# Altium PCB COMMS_ECU_revA.PcbDoc (part 3 of 6)
Units mm, origin at the board's own origin, x right, y up, seen from the top; angles counter-clockwise.
Board outline 370 x 261 mm, 6 copper layers (Top Layer, Mid Layer 1, Mid Layer 2, Mid Layer 3, Mid Layer 4, Bottom Layer), stack 1.538 mm thick; 739 components, 500 nets, 2454 pads, 325 vias.
Unrouted connection lines stored in the file: 1573.
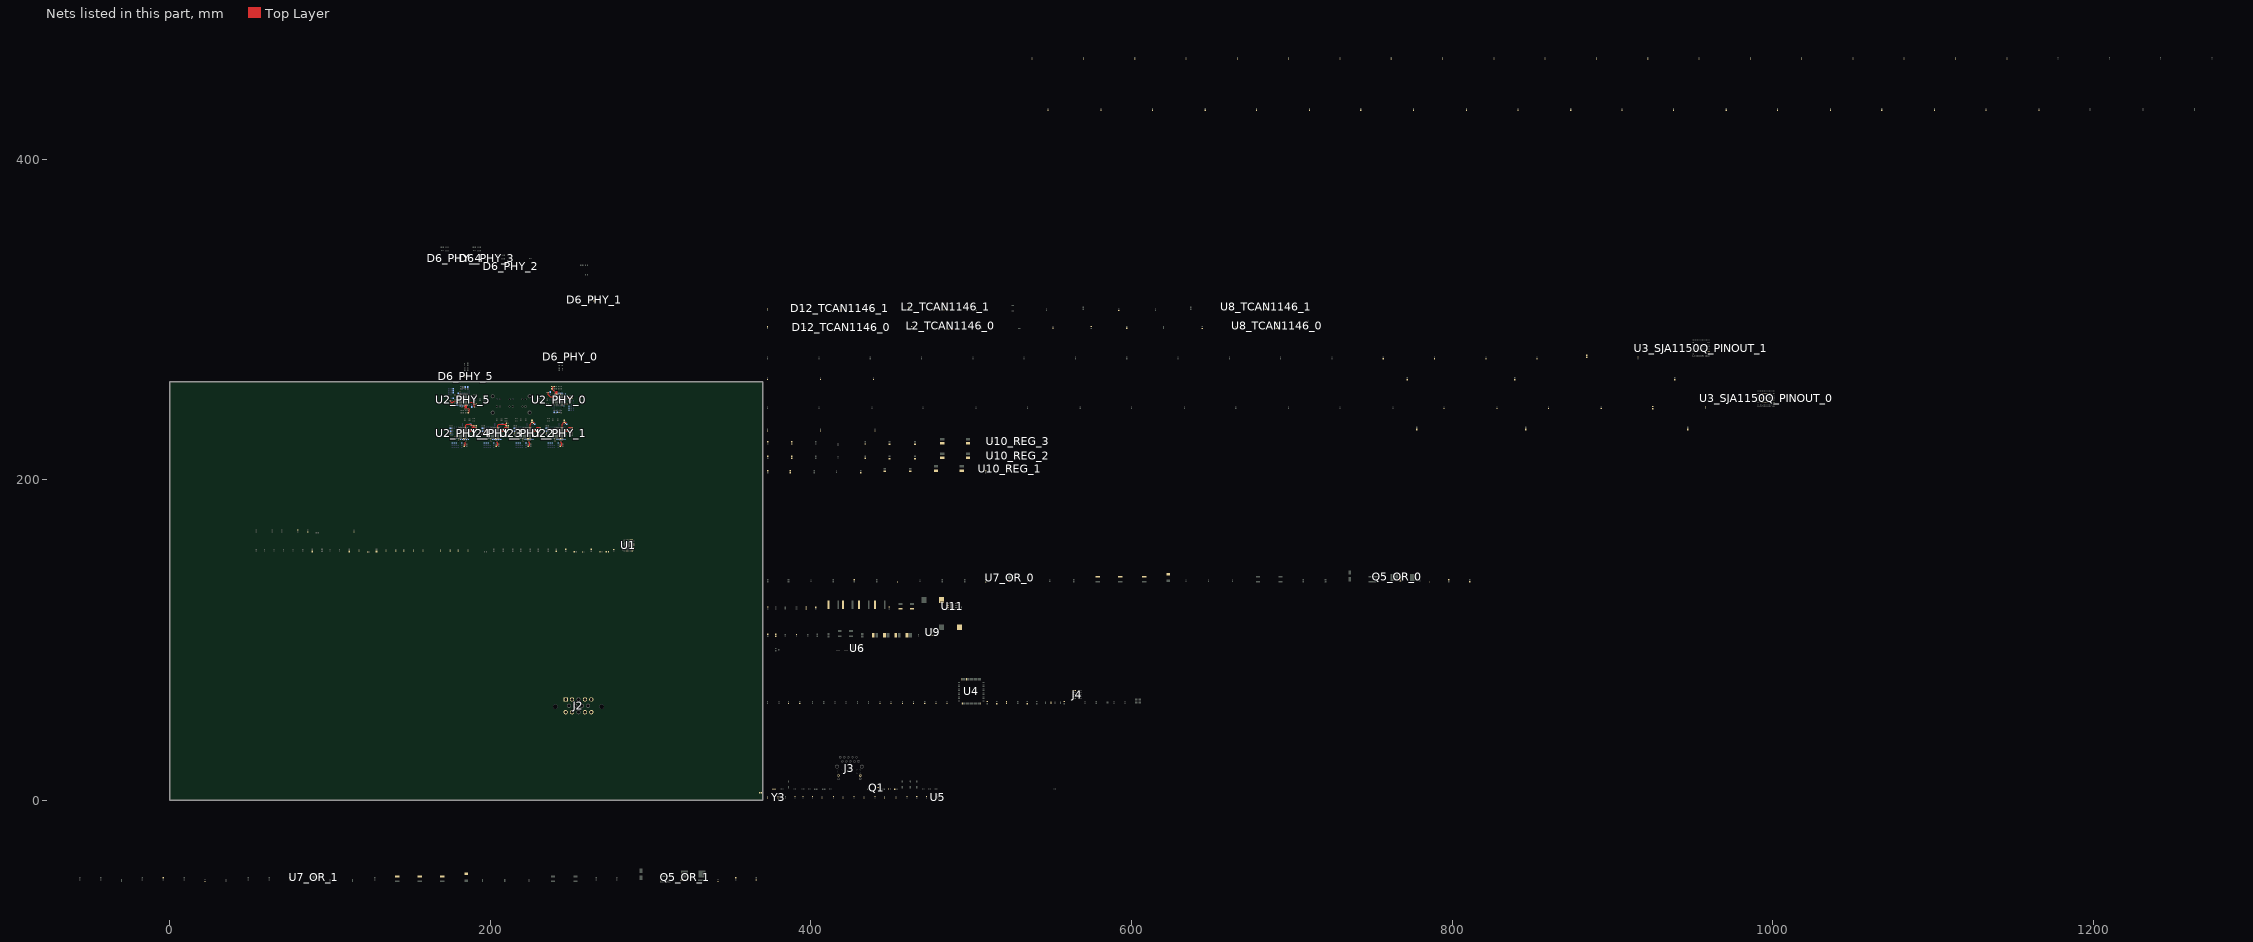
[diagram p3: the nets of this part, all layers, seen from the top]

## Footprints (in the part's own frame and the unit in brackets; to place one, negate y for a bottom-side part, rotate by r counter-clockwise, add the part's x,y. Pads: shape width x height; smd on the part's side, far side on the other; paste and mask are expansions set on the pad) (continued)
FP-RPH0016A-MFG [mm]
  round 0.743 smd paste-1000 mask+0: 1(-1.262,1.763)
  rrect25% 1.075x0.4 smd paste+0 mask+0: 2(-1.413,0.55) 14(1.413,0.55)
  rrect40% 0.825x0.25 smd paste+0 mask+0: 3(-1.538,-0.525) 4(-1.538,-1.025) 5(-1.538,-1.525) 11(1.538,-1.525) 12(1.538,-1.025) 13(1.538,-0.525)
  round 0.495 smd paste-1000 mask+0: 6(-1.125,-2.175) 10(1.125,-2.175)
  rrect40% 0.25x0.675 smd paste+0 mask+0: 7(-0.5,-2.113) 9(0.5,-2.113)
  rrect40% 0.25x0.825 smd paste+0 mask+0: 8(0,-2.038)
  round 0.787 smd paste-1000 mask+0: 15(1.281,1.831)
  rrect29% 0.35x2.975 smd paste+0 mask+0: 16(0,0.963)
  Top Layer region: 1.9,1.35 1.925,1.357 1.943,1.375 1.95,1.4 1.95,1.4 1.95,2.05 1.943,2.075 1.925,2.093 1.9,2.1 1.9,2.1 1.65,2.1 1.631,2.104 1.615,2.115 1.604,2.131 1.6,2.15 1.6,2.15 1.6,2.4 1.593,2.425 1.575,2.443 1.55,2.45 1.55,2.45 0.85,2.45 0.825,2.443 0.807,2.425 0.8,2.4 0.8,2.4 0.8,1.4 0.807,1.375 0.825,1.357 0.85,1.35 0.85,1.35 0.85,1.35
  Top Layer region: -1.9,1.35 -1.925,1.357 -1.943,1.375 -1.95,1.4 -1.95,1.4 -1.95,2.05 -1.943,2.075 -1.925,2.093 -1.9,2.1 -1.9,2.1 -1.65,2.1 -1.631,2.104 -1.615,2.115 -1.604,2.131 -1.6,2.15 -1.6,2.15 -1.6,2.4 -1.593,2.425 -1.575,2.443 -1.55,2.45 -1.55,2.45 -0.85,2.45 -0.825,2.443 -0.807,2.425 -0.8,2.4 -0.8,2.4 -0.8,1.4 -0.807,1.375 -0.825,1.357 -0.85,1.35 -0.85,1.35 -0.85,1.35
  Top Layer region: 1.55,-2.45 1.575,-2.443 1.593,-2.425 1.6,-2.4 1.6,-2.4 1.6,-2.15 1.604,-2.131 1.615,-2.115 1.631,-2.104 1.65,-2.1 1.65,-2.1 1.9,-2.1 1.925,-2.093 1.943,-2.075 1.95,-2.05 1.95,-2.05 1.95,-1.95 1.943,-1.925 1.925,-1.907 1.9,-1.9 1.9,-1.9 0.9,-1.9 0.875,-1.907 0.857,-1.925 0.85,-1.95 0.85,-1.95 0.85,-2.4 0.857,-2.425 0.875,-2.443 0.9,-2.45 0.9,-2.45 0.9,-2.45
  Top Layer region: -1.55,-2.45 -1.575,-2.443 -1.593,-2.425 -1.6,-2.4 -1.6,-2.4 -1.6,-2.15 -1.604,-2.131 -1.615,-2.115 -1.631,-2.104 -1.65,-2.1 -1.65,-2.1 -1.9,-2.1 -1.925,-2.093 -1.943,-2.075 -1.95,-2.05 -1.95,-2.05 -1.95,-1.95 -1.943,-1.925 -1.925,-1.907 -1.9,-1.9 -1.9,-1.9 -0.9,-1.9 -0.875,-1.907 -0.857,-1.925 -0.85,-1.95 -0.85,-1.95 -0.85,-2.4 -0.857,-2.425 -0.875,-2.443 -0.9,-2.45 -0.9,-2.45 -0.9,-2.45
  silkscreen extent -2.67,-2.88 1.8,2.88, body extent -2.05,-2.55 2.05,2.55, height 0.25
FP-SMB-CA-MFG [mm]
  rect 1.62x2.18 smd paste+0 mask+0: 1(-2.11,0) 2(2.11,0)
  silkscreen extent -2.3,-1.97 2.3,1.97, body extent -3.02,-2.07 3.02,2.07, height 0.25
FP-SOD-123-IPC_A [mm]
  rect 1.308x0.762 smd paste+0 mask+0: 1(-1.825,0)
  rrect100% 1.308x0.762 smd paste+0 mask+0: 2(1.825,0)
  silkscreen extent -2.39,-0.8 1.35,1.01, body extent -2.98,-1.3 2.98,1.3, height 0.25
FP-SOT323-3L-MFG [mm]
  rect 0.7x0.42 smd paste+0 mask+0: 1(-1,0.65) 2(-1,-0.65) 3(1,0)
  silkscreen extent -0.67,-1.1 0.67,1.1, body extent -1.45,-1.2 1.45,1.2, height 0.25
FP-SRF4532-MFG [mm]
  round 0.99 smd paste+0 mask+0: 1(-2.05,-1.25) 2(2.05,-1.25)
  round 0.97 smd paste+0 mask+0: 3(2.05,1.125) 4(-2.05,1.125)
  Top Layer region: -2.6,0.45 -2.6,1.8 -1.5,1.8 -1.5,0.95 -1.9,0.45
  Top Layer region: 1.5,1.8 2.6,1.8 2.6,0.45 1.9,0.45 1.5,0.95
  Top Layer region: 1.5,-1.8 1.5,-0.95 1.9,-0.45 2.6,-0.45 2.6,-1.8
  Top Layer region: -2.6,-1.8 -2.6,-0.45 -1.9,-0.45 -1.5,-0.95 -1.5,-1.8
  silkscreen extent -2.17,-2.47 1.12,1.7, body extent -2.7,-1.9 2.7,1.9, height 0.25
NDG20S2_MFG [mm] "Recommended Land Pattern"
  round 0.18 smd paste+0 mask+0: 1(-1.385,0.8) 2(-1.385,0.4) 3(-1.385,0) 4(-1.375,-0.4) 5(-1.375,-0.8) 6(-0.8,-1.385) 7(-0.4,-1.385) 8(0,-1.385) 9(0.4,-1.375) 10(0.8,-1.375) 11(1.385,-0.8) 12(1.385,-0.4) 13(1.385,0) 14(1.375,0.4) 15(1.375,0.8) 16(0.8,1.385) 17(0.4,1.385) 18(0,1.385) 19(-0.4,1.375) 20(-0.8,1.375)
  round 1.485 smd paste+0 mask+0: 21(0,0)
  Top Layer region: 1.65,0.7 1.2,0.7 1.162,0.708 1.129,0.729 1.108,0.762 1.1,0.8 1.1,0.8 1.108,0.838 1.129,0.871 1.162,0.892 1.2,0.9 1.2,0.9 1.65,0.9
  Top Layer region: -0.7,1.65 -0.7,1.2 -0.713,1.15 -0.75,1.113 -0.8,1.1 -0.8,1.1 -0.838,1.108 -0.871,1.129 -0.892,1.162 -0.9,1.2 -0.9,1.2 -0.9,1.65
  Top Layer region: -0.1,-1.65 -0.1,-1.2 -0.092,-1.162 -0.071,-1.129 -0.038,-1.108 0,-1.1 0,-1.1 0.038,-1.108 0.071,-1.129 0.092,-1.162 0.1,-1.2 0.1,-1.2 0.1,-1.65
  Top Layer region: -1.65,-0.3 -1.2,-0.3 -1.162,-0.308 -1.129,-0.329 -1.108,-0.362 -1.1,-0.4 -1.1,-0.4 -1.113,-0.45 -1.15,-0.487 -1.2,-0.5 -1.2,-0.5 -1.65,-0.5
  Top Layer region: 0.5,1.65 0.5,1.2 0.487,1.15 0.45,1.113 0.4,1.1 0.4,1.1 0.362,1.108 0.329,1.129 0.308,1.162 0.3,1.2 0.3,1.2 0.3,1.65
  Top Layer region: 1.65,-0.1 1.2,-0.1 1.162,-0.092 1.129,-0.071 1.108,-0.038 1.1,0 1.1,0 1.108,0.038 1.129,0.071 1.162,0.092 1.2,0.1 1.2,0.1 1.65,0.1
  Top Layer region: -0.825,-0.825 0.825,-0.825 0.825,0.825 -0.525,0.825 -0.825,0.525
  Top Layer region: 0.7,-1.65 0.7,-1.2 0.708,-1.162 0.729,-1.129 0.762,-1.108 0.8,-1.1 0.8,-1.1 0.838,-1.108 0.871,-1.129 0.892,-1.162 0.9,-1.2 0.9,-1.2 0.9,-1.65
  Top Layer region: -0.9,-1.65 -0.9,-1.2 -0.892,-1.162 -0.871,-1.129 -0.838,-1.108 -0.8,-1.1 -0.8,-1.1 -0.762,-1.108 -0.729,-1.129 -0.708,-1.162 -0.7,-1.2 -0.7,-1.2 -0.7,-1.65
  Top Layer region: -1.65,0.5 -1.2,0.5 -1.162,0.492 -1.129,0.471 -1.108,0.438 -1.1,0.4 -1.1,0.4 -1.113,0.35 -1.15,0.313 -1.2,0.3 -1.2,0.3 -1.65,0.3
  Top Layer region: -0.3,1.65 -0.3,1.2 -0.313,1.15 -0.35,1.113 -0.4,1.1 -0.4,1.1 -0.438,1.108 -0.471,1.129 -0.492,1.162 -0.5,1.2 -0.5,1.2 -0.5,1.65
  Top Layer region: 0.1,1.65 0.1,1.2 0.087,1.15 0.05,1.113 0,1.1 0,1.1 -0.038,1.108 -0.071,1.129 -0.092,1.162 -0.1,1.2 -0.1,1.2 -0.1,1.65
  Top Layer region: 0.9,1.65 0.9,1.2 0.887,1.15 0.85,1.113 0.8,1.1 0.8,1.1 0.762,1.108 0.729,1.129 0.708,1.162 0.7,1.2 0.7,1.2 0.7,1.65
  Top Layer region: 1.65,0.3 1.2,0.3 1.162,0.308 1.129,0.329 1.108,0.362 1.1,0.4 1.1,0.4 1.108,0.438 1.129,0.471 1.162,0.492 1.2,0.5 1.2,0.5 1.65,0.5
  Top Layer region: 1.65,-0.5 1.2,-0.5 1.162,-0.492 1.129,-0.471 1.108,-0.438 1.1,-0.4 1.1,-0.4 1.108,-0.362 1.129,-0.329 1.162,-0.308 1.2,-0.3 1.2,-0.3 1.65,-0.3
  Top Layer region: 1.65,-0.9 1.2,-0.9 1.162,-0.892 1.129,-0.871 1.108,-0.838 1.1,-0.8 1.1,-0.8 1.108,-0.762 1.129,-0.729 1.162,-0.708 1.2,-0.7 1.2,-0.7 1.65,-0.7
  Top Layer region: 0.3,-1.65 0.3,-1.2 0.308,-1.162 0.329,-1.129 0.362,-1.108 0.4,-1.1 0.4,-1.1 0.438,-1.108 0.471,-1.129 0.492,-1.162 0.5,-1.2 0.5,-1.2 0.5,-1.65
  Top Layer region: -0.5,-1.65 -0.5,-1.2 -0.492,-1.162 -0.471,-1.129 -0.438,-1.108 -0.4,-1.1 -0.4,-1.1 -0.362,-1.108 -0.329,-1.129 -0.308,-1.162 -0.3,-1.2 -0.3,-1.2 -0.3,-1.65
  Top Layer region: -1.65,-0.7 -1.2,-0.7 -1.162,-0.708 -1.129,-0.729 -1.108,-0.762 -1.1,-0.8 -1.1,-0.8 -1.113,-0.85 -1.15,-0.887 -1.2,-0.9 -1.2,-0.9 -1.65,-0.9
  Top Layer region: -1.65,0.1 -1.2,0.1 -1.162,0.092 -1.129,0.071 -1.108,0.038 -1.1,0 -1.1,0 -1.113,-0.05 -1.15,-0.087 -1.2,-0.1 -1.2,-0.1 -1.65,-0.1
  Top Layer region: -1.65,0.9 -1.2,0.9 -1.162,0.892 -1.129,0.871 -1.108,0.838 -1.1,0.8 -1.1,0.8 -1.113,0.75 -1.15,0.713 -1.2,0.7 -1.2,0.7 -1.65,0.7
  silkscreen extent -2.17,-1.61 1.61,1.61, body extent -1.5,-1.5 1.5,1.5, height 1
ONSC-SOD-523-2-502-01_V [mm] "SOD, 2-Leads, Body 1.2x0.8mm"
  rect 0.48x0.4 smd: 1(-0.66,0) 2(0.66,0)
  silkscreen extent -0.75,-0.4 0.07,0.65, body extent -0.6,-0.4 0.6,0.4, height 0.7
QFN50P400X400X100_HS-25N [mm] "QFN, 24-Leads, Body 4.00x4.00mm, Pitch 0.50mm, Thermal Pad 2.10x2.10mm, IPC Medium Density"
  oval 0.95x0.25 smd: 1(-1.875,1.25) 2(-1.875,0.75) 3(-1.875,0.25) 4(-1.875,-0.25) 5(-1.875,-0.75) 6(-1.875,-1.25) 13(1.875,-1.25) 14(1.875,-0.75) 15(1.875,-0.25) 16(1.875,0.25) 17(1.875,0.75) 18(1.875,1.25)
  oval 0.25x0.95 smd: 7(-1.25,-1.875) 8(-0.75,-1.875) 9(-0.25,-1.875) 10(0.25,-1.875) 11(0.75,-1.875) 12(1.25,-1.875) 19(1.25,1.875) 20(0.75,1.875) 21(0.25,1.875) 22(-0.25,1.875) 23(-0.75,1.875) 24(-1.25,1.875)
  rect 2.1x2.1 smd: 25(0,0)
  silkscreen extent -2.97,-2.2 2.2,2.2, body extent -2.05,-2.05 2.05,2.05, height 1
QFN50P700X700X100_HS-49N [mm] "QFN, 48-Leads, Body 7.00x7.00mm, Pitch 0.50mm, Thermal Pad 5.05x5.05mm, IPC Medium Density"
  oval 0.85x0.25 smd: 1(-3.4,2.75) 2(-3.4,2.25) 3(-3.4,1.75) 4(-3.4,1.25) 5(-3.4,0.75) 6(-3.4,0.25) 7(-3.4,-0.25) 8(-3.4,-0.75) 9(-3.4,-1.25) 10(-3.4,-1.75) 11(-3.4,-2.25) 12(-3.4,-2.75) 25(3.4,-2.75) 26(3.4,-2.25) 27(3.4,-1.75) 28(3.4,-1.25) 29(3.4,-0.75) 30(3.4,-0.25) 31(3.4,0.25) 32(3.4,0.75) 33(3.4,1.25) 34(3.4,1.75) 35(3.4,2.25) 36(3.4,2.75)
  oval 0.25x0.85 smd: 13(-2.75,-3.4) 14(-2.25,-3.4) 15(-1.75,-3.4) 16(-1.25,-3.4) 17(-0.75,-3.4) 18(-0.25,-3.4) 19(0.25,-3.4) 20(0.75,-3.4) 21(1.25,-3.4) 22(1.75,-3.4) 23(2.25,-3.4) 24(2.75,-3.4) 37(2.75,3.4) 38(2.25,3.4) 39(1.75,3.4) 40(1.25,3.4) 41(0.75,3.4) 42(0.25,3.4) 43(-0.25,3.4) 44(-0.75,3.4) 45(-1.25,3.4) 46(-1.75,3.4) 47(-2.25,3.4) 48(-2.75,3.4)
  rect 5.05x5.05 smd: 49(0,0)
  silkscreen extent -4.42,-3.65 3.65,3.65, body extent -3.5,-3.5 3.5,3.5, height 1
R0603B [mm] "Chip Resistor, 0603, 2-Leads, Body 1.58x0.85mm, IPC Medium Density"
  rrect25% 0.8x0.95 smd: 1(-0.65,0) 2(0.65,0)
  silkscreen extent -0.2,-0.7 0.2,0.7, body extent -0.82,-0.48 0.82,0.48, height 0.5
RESC1005X40X25ML05T05 [mm] "Chip Resistor, 2-Leads, Body 1.00x0.50mm, IPC Low Density"
  rect 0.65x0.65 smd: 1(-0.5,0) 2(0.5,0)
  body extent -0.53,-0.27 0.53,0.28, height 0.4
RJMG201K21120FR-Footprint-1 [mm]
  round 1.53 hole 1.02: L1(-6.785,-4.57) L2(-6.785,-2.54) L3(6.785,-4.57) L4(6.785,-2.54)
  rect 1.398x1.398 / inner round 1.398 / far side rect 1.398x1.398 hole 0.89: P1(5.715,6.35)
  round 1.398 hole 0.89: P2(4.445,8.89) P3(3.175,6.35) P4(1.905,8.89) P5(0.635,6.35) P6(-0.635,8.89) P7(-1.905,6.35) P8(-3.175,8.89) P9(-4.445,6.35) P10(-5.715,8.89)
  round 2.4 hole 1.6: S1(-7.745,3.05) S2(7.745,3.05)
  round 3.25 hole 3.25 unplated: ""(-5.715,0) ""(5.715,0)
  silkscreen extent -7.88,-10.84 8.63,10.81, body extent -8.87,-10.84 8.87,10.81, height 14.8
SISH615ADN-T1-GE3-Footprint-1 [mm]
  rect 0.35x0.5 smd paste+0 mask+0: 1(-0.937,-1.4) 2(-0.288,-1.4) 3(0.363,-1.4) 4(1.012,-1.4)
  round 0.025 smd mask+0: 5-6-7-8(0.038,0.51)
  Top Layer region: -1.187,-0.63 -1.187,-0.215 -1.568,-0.215 -1.568,0.215 -1.187,0.215 -1.187,1.35 -1.137,1.35 -1.137,1.65 -0.737,1.65 -0.737,1.35 -0.487,1.35 -0.487,1.65 -0.088,1.65 -0.088,1.35 0.163,1.35 0.163,1.65 0.563,1.65 0.563,1.35 0.813,1.35 0.813,1.65 1.212,1.65 1.212,1.35 1.262,1.35 1.262,0.215 1.643,0.215 1.643,-0.215 1.262,-0.215 1.262,-0.63
  silkscreen extent -1.51,-2.37 1.59,-1.01, body extent -1.67,-1.75 1.74,1.75, height 0.25
SJA1105QELY-Footprint-1 [mm]
  round 0.4 smd: A1(-5.2,5.2) A2(-4.4,5.2) A3(-3.6,5.2) A4(-2.8,5.2) A5(-2,5.2) A6(-1.2,5.2) A7(-0.4,5.2) A8(0.4,5.2) A9(1.2,5.2) A10(2,5.2) A11(2.8,5.2) A12(3.6,5.2) A13(4.4,5.2) A14(5.2,5.2) B1(-5.2,4.4) B3(-3.6,4.4) B4(-2.8,4.4) B5(-2,4.4) B6(-1.2,4.4) B7(-0.4,4.4) B8(0.4,4.4) B9(1.2,4.4) B10(2,4.4) B11(2.8,4.4) B12(3.6,4.4) B13(4.4,4.4) B14(5.2,4.4) C1(-5.2,3.6) C2(-4.4,3.6) C13(4.4,3.6) C14(5.2,3.6) D1(-5.2,2.8) D2(-4.4,2.8) D4(-2.8,2.8) D5(-2,2.8) D6(-1.2,2.8) D7(-0.4,2.8) D8(0.4,2.8) D9(1.2,2.8) D10(2,2.8) D11(2.8,2.8) D13(4.4,2.8) D14(5.2,2.8) E1(-5.2,2) E2(-4.4,2) E4(-2.8,2) E5(-2,2) E6(-1.2,2) E7(-0.4,2) E8(0.4,2) E9(1.2,2) E10(2,2) E11(2.8,2) E13(4.4,2) E14(5.2,2) F1(-5.2,1.2) F2(-4.4,1.2) F4(-2.8,1.2) F5(-2,1.2) F6(-1.2,1.2) F7(-0.4,1.2) F8(0.4,1.2) F9(1.2,1.2) F10(2,1.2) F11(2.8,1.2) F13(4.4,1.2) F14(5.2,1.2) G1(-5.2,0.4) G2(-4.4,0.4) G4(-2.8,0.4) G5(-2,0.4) G6(-1.2,0.4) G7(-0.4,0.4) G8(0.4,0.4) G9(1.2,0.4) G10(2,0.4) G11(2.8,0.4) G13(4.4,0.4) G14(5.2,0.4) H1(-5.2,-0.4) H2(-4.4,-0.4) H4(-2.8,-0.4) H5(-2,-0.4) H6(-1.2,-0.4) H7(-0.4,-0.4) H8(0.4,-0.4) H9(1.2,-0.4) H10(2,-0.4) H11(2.8,-0.4) H13(4.4,-0.4) H14(5.2,-0.4) J1(-5.2,-1.2) J2(-4.4,-1.2) J4(-2.8,-1.2) J5(-2,-1.2) J6(-1.2,-1.2) J7(-0.4,-1.2) J8(0.4,-1.2) J9(1.2,-1.2) J10(2,-1.2) J11(2.8,-1.2) J13(4.4,-1.2) J14(5.2,-1.2) K1(-5.2,-2) K2(-4.4,-2) K4(-2.8,-2) K5(-2,-2) K6(-1.2,-2) K7(-0.4,-2) K8(0.4,-2) K9(1.2,-2) K10(2,-2) K11(2.8,-2) K13(4.4,-2) K14(5.2,-2) L1(-5.2,-2.8) L2(-4.4,-2.8) L4(-2.8,-2.8) L5(-2,-2.8) L6(-1.2,-2.8) L7(-0.4,-2.8) L8(0.4,-2.8) L9(1.2,-2.8) L10(2,-2.8) L11(2.8,-2.8) L13(4.4,-2.8) L14(5.2,-2.8) M1(-5.2,-3.6) M2(-4.4,-3.6) M13(4.4,-3.6) M14(5.2,-3.6) N1(-5.2,-4.4) N2(-4.4,-4.4) N3(-3.6,-4.4) N4(-2.8,-4.4) N5(-2,-4.4) N6(-1.2,-4.4) N7(-0.4,-4.4) N8(0.4,-4.4) N9(1.2,-4.4) N10(2,-4.4) N11(2.8,-4.4) N12(3.6,-4.4) N13(4.4,-4.4) N14(5.2,-4.4) P1(-5.2,-5.2) P2(-4.4,-5.2) P3(-3.6,-5.2) P4(-2.8,-5.2) P5(-2,-5.2) P6(-1.2,-5.2) P7(-0.4,-5.2) P8(0.4,-5.2) P9(1.2,-5.2) P10(2,-5.2) P11(2.8,-5.2) P12(3.6,-5.2) P13(4.4,-5.2) P14(5.2,-5.2)
  silkscreen extent -6.1,-6 6,6.1, body extent -6,-6 6,6, height 1.5
SOIC127P600X163_HS-9N [mm] "SOIC, 8-Leads, Body 4.90x3.85mm, Pitch 1.27mm, Thermal Pad 3.35x2.71mm, IPC Medium Density"
  oval 1.5x0.6 smd: 1(-2.7,1.905) 2(-2.7,0.635) 3(-2.7,-0.635) 4(-2.7,-1.905) 5(2.7,-1.905) 6(2.7,-0.635) 7(2.7,0.635) 8(2.7,1.905)
  rect 2.71x3.35 smd: EPAD(0,0)
  silkscreen extent -2.82,-2.5 1.55,2.88, body extent -3.05,-2.48 3.05,2.48, height 1.5
TCAN1146DYYRQ1-Footprint-1 [mil]
  rect 38.5x12 smd paste+0 mask+0: 1(-60.75,59.07) 2(-60.75,39.38) 3(-60.75,19.69) 4(-60.75,0) 5(-60.75,-19.69) 6(-60.75,-39.38) 7(-60.75,-59.07) 8(60.75,-59.07) 9(60.75,-39.38) 10(60.75,-19.69) 11(60.75,0) 12(60.75,19.69) 13(60.75,39.38) 14(60.75,59.07)
  silkscreen extent -47,-90 100,90, body extent -66,-84 66,84, height 43
WE-LHMI_1335 [mm] "SMT Power Inductor, 2-Leads, body 12.6x12.6mm"
  rect 3.1x3.5 smd: 1(-5.55,0) 2(5.55,0)
  Top Layer keep-out region: -3.9,6.45 3.9,6.45 3.9,-6.45 -3.9,-6.45
  silkscreen extent -7.72,-6.45 6.45,6.45, body extent -6.75,-6.3 6.75,6.3, height 3.3
WL-SBCD_0606 [mm] "SMT Bi-color Chip LED Diffuesed, body 1.5x1.6mm"
  rect 0.5x0.8 smd: 1(-0.45,0.8) 2(-0.45,-0.8) 3(0.45,-0.8) 4(0.45,0.8)
  silkscreen extent -0.07,1.47 0.07,1.62, body extent -0.75,-0.8 0.75,0.8, height 0.55

## Part data
C1 C2 C3 C4 C5 C6 C7 C8 C9 C10 C11 C12 C13 C14 C15 C16 C17 C18 C19 C20 C21 C22 C23 C24 C25 C26 C27 C28 C29 C30 C31_PHY_0 C31_PHY_1 C31_PHY_2 C31_PHY_3 C31_PHY_4 C31_PHY_5 C32_PHY_0 C32_PHY_1 C32_PHY_2 C32_PHY_3 C32_PHY_4 C32_PHY_5 C33_PHY_0 C33_PHY_1 C33_PHY_2 C33_PHY_3 C33_PHY_4 C33_PHY_5 C34_PHY_0 C34_PHY_1 C34_PHY_2 C34_PHY_3 C34_PHY_4 C34_PHY_5 C35_PHY_0 C35_PHY_1 C35_PHY_2 C35_PHY_3 C35_PHY_4 C35_PHY_5 C36_PHY_0 C36_PHY_1 C36_PHY_2 C36_PHY_3 C36_PHY_4 C36_PHY_5 C37_PHY_0 C37_PHY_1 C37_PHY_2 C37_PHY_3 C37_PHY_4 C37_PHY_5 C38_PHY_0 C38_PHY_1 C38_PHY_2 C38_PHY_3 C38_PHY_4 C38_PHY_5 C39_PHY_0 C39_PHY_1 C39_PHY_2 C39_PHY_3 C39_PHY_4 C39_PHY_5 C40_PHY_0 C40_PHY_1 C40_PHY_2 C40_PHY_3 C40_PHY_4 C40_PHY_5 C41_PHY_0 C41_PHY_1 C41_PHY_2 C41_PHY_3 C41_PHY_4 C41_PHY_5 C42_PHY_0 C42_PHY_1 C42_PHY_2 C42_PHY_3 C42_PHY_4 C42_PHY_5 C43_PHY_0 C43_PHY_1 C43_PHY_2 C43_PHY_3 C43_PHY_4 C43_PHY_5 C44_PHY_0 C44_PHY_1 C44_PHY_2 C44_PHY_3 C44_PHY_4 C44_PHY_5 C45_PHY_0 C45_PHY_1 C45_PHY_2 C45_PHY_3 C45_PHY_4 C45_PHY_5 C46_PHY_0 C46_PHY_1 C46_PHY_2 C46_PHY_3 C46_PHY_4 C46_PHY_5 C47_PHY_0 C47_PHY_1 C47_PHY_2 C47_PHY_3 C47_PHY_4 C47_PHY_5 C48_PHY_0 C48_PHY_1 C48_PHY_2 C48_PHY_3 C48_PHY_4 C48_PHY_5 C49_PHY_0 C49_PHY_1 C49_PHY_2 C49_PHY_3 C49_PHY_4 C49_PHY_5 C50_PHY_0 C50_PHY_1 C50_PHY_2 C50_PHY_3 C50_PHY_4 C50_PHY_5 C51_PHY_0 C51_PHY_1 C51_PHY_2 C51_PHY_3 C51_PHY_4 C51_PHY_5 C52_PHY_0 C52_PHY_1 C52_PHY_2 C52_PHY_3 C52_PHY_4 C52_PHY_5 C53_PHY_0 C53_PHY_1 C53_PHY_2 C53_PHY_3 C53_PHY_4 C53_PHY_5 C54_PHY_0 C54_PHY_1 C54_PHY_2 C54_PHY_3 C54_PHY_4 C54_PHY_5 C55_PHY_0 C55_PHY_1 C55_PHY_2 C55_PHY_3 C55_PHY_4 C55_PHY_5 C56_PHY_0 C56_PHY_1 C56_PHY_2 C56_PHY_3 C56_PHY_4 C56_PHY_5 C57_PHY_0 C57_PHY_1 C57_PHY_2 C57_PHY_3 C57_PHY_4 C57_PHY_5 C58_PHY_0 C58_PHY_1 C58_PHY_2 C58_PHY_3 C58_PHY_4 C58_PHY_5 C59_SJA1150Q_PINOUT_0 C59_SJA1150Q_PINOUT_1 C60_SJA1150Q_PINOUT_0 C60_SJA1150Q_PINOUT_1 C61_SJA1150Q_PINOUT_0 C61_SJA1150Q_PINOUT_1 C62_SJA1150Q_PINOUT_0 C62_SJA1150Q_PINOUT_1 C63_SJA1150Q_PINOUT_0 C63_SJA1150Q_PINOUT_1 C64_SJA1150Q_PINOUT_0 C64_SJA1150Q_PINOUT_1 C65_SJA1150Q_PINOUT_0 C65_SJA1150Q_PINOUT_1 C66_SJA1150Q_PINOUT_0 C66_SJA1150Q_PINOUT_1 C67_SJA1150Q_PINOUT_0 C67_SJA1150Q_PINOUT_1 C68_SJA1150Q_PINOUT_0 C68_SJA1150Q_PINOUT_1 C69_SJA1150Q_PINOUT_0 C69_SJA1150Q_PINOUT_1 C70_SJA1150Q_PINOUT_0 C70_SJA1150Q_PINOUT_1 C71_SJA1150Q_PINOUT_0 C71_SJA1150Q_PINOUT_1 C72_SJA1150Q_PINOUT_0 C72_SJA1150Q_PINOUT_1 C73_SJA1150Q_PINOUT_0 C73_SJA1150Q_PINOUT_1 C74_SJA1150Q_PINOUT_0 C74_SJA1150Q_PINOUT_1 C75_SJA1150Q_PINOUT_0 C75_SJA1150Q_PINOUT_1 C76_SJA1150Q_PINOUT_0 C76_SJA1150Q_PINOUT_1 C77_SJA1150Q_PINOUT_0 C77_SJA1150Q_PINOUT_1 C78_SJA1150Q_PINOUT_0 C78_SJA1150Q_PINOUT_1 C79_SJA1150Q_PINOUT_0 C79_SJA1150Q_PINOUT_1 C80_SJA1150Q_PINOUT_0 C80_SJA1150Q_PINOUT_1 C81_SJA1150Q_PINOUT_0 C81_SJA1150Q_PINOUT_1 C82_SJA1150Q_PINOUT_0 C82_SJA1150Q_PINOUT_1 C83_SJA1150Q_PINOUT_0 C83_SJA1150Q_PINOUT_1 C84_SJA1150Q_PINOUT_0 C84_SJA1150Q_PINOUT_1 C85_SJA1150Q_PINOUT_0 C85_SJA1150Q_PINOUT_1 C86_SJA1150Q_PINOUT_0 C86_SJA1150Q_PINOUT_1 C87_SJA1150Q_PINOUT_0 C87_SJA1150Q_PINOUT_1 C88_SJA1150Q_PINOUT_0 C88_SJA1150Q_PINOUT_1 C89_SJA1150Q_PINOUT_0 C89_SJA1150Q_PINOUT_1 C90_SJA1150Q_PINOUT_0 C90_SJA1150Q_PINOUT_1 C91_SJA1150Q_PINOUT_0 C91_SJA1150Q_PINOUT_1 C92_SJA1150Q_PINOUT_0 C92_SJA1150Q_PINOUT_1 C93_SJA1150Q_PINOUT_0 C93_SJA1150Q_PINOUT_1 C94_SJA1150Q_PINOUT_0 C94_SJA1150Q_PINOUT_1 C95_SJA1150Q_PINOUT_0 C95_SJA1150Q_PINOUT_1 C96_SJA1150Q_PINOUT_0 C96_SJA1150Q_PINOUT_1 C97_SJA1150Q_PINOUT_0 C97_SJA1150Q_PINOUT_1 C98_SJA1150Q_PINOUT_0 C98_SJA1150Q_PINOUT_1 C99_SJA1150Q_PINOUT_0 C99_SJA1150Q_PINOUT_1 C100_SJA1150Q_PINOUT_0 C100_SJA1150Q_PINOUT_1 C101_SJA1150Q_PINOUT_0 C101_SJA1150Q_PINOUT_1 C102_SJA1150Q_PINOUT_0 C102_SJA1150Q_PINOUT_1 C110 C111 C112 C113 C114 C115 C116 C117 C118 C119 C120 C121 C122 C123 C124 C125 C126 C127 C128 C129 C130 C131 C132 C133 C134 C135 C136 C137 C138 C142_OR_0 C142_OR_1 C143_OR_0 C143_OR_1 C144_OR_0 C144_OR_1 C148_OR_0 C148_OR_1 C149_OR_0 C149_OR_1 C150_OR_0 C150_OR_1 C151_OR_0 C151_OR_1 C152_TCAN1146_0 C152_TCAN1146_1 C153_TCAN1146_0 C153_TCAN1146_1 C154_TCAN1146_0 C154_TCAN1146_1 C155_TCAN1146_0 C155_TCAN1146_1 C156_TCAN1146_0 C156_TCAN1146_1 C157_TCAN1146_0 C157_TCAN1146_1 C158_TCAN1146_0 C158_TCAN1146_1 C159 C168 C169 C174_REG_1 C174_REG_2 C174_REG_3 C175 C178 C183: library part CMP-001-00058-1, "LARGE PADS, 0402 CAP, CHANGE COMMENT TO MATCH REAL P/N", Capacitor Type=Ceramic, Case/Package=0402, Max Operating Temperature=85°C, Min Operating Temperature=-55°C, Mounting Technology="Surface Mount", Pins=2, RoHS Compliant=Yes
C139_OR_0 C139_OR_1: library part CMP-05427-000030-1, "CAP ALUM 10UF 20% 50V SMD", Capacitance=10uF, Case/Package=Radial, Dielectric Material=Aluminium, ESR (Equivalent Series Resistance)=1.52R, Leakage Current=3uA, Max Operating Temperature=105°C, Min Operating Temperature=-55°C, Package Quantity=1000, Ripple Current=85mA, Tolerance=20%, Voltage=50V, Construction=Cylindrical, Contact Plating=Tin, Diameter=5mm, Height=5.8mm, Height - Seated (Max)=0.228inch, Impedance=1.52R, Lead Free="Lead Free", Length=5.8mm, Life (Hours)=2000Hour, Material=Aluminium, Mount="Surface Mount", Number of Pins=2, Packaging="Tape and Reel", Radiation Hardening=No, REACH SVHC="No SVHC", Ripple Current (AC)=85mA, RoHS Compliant=Yes, Series=FK, Termination=SMD/SMT, Voltage Rating=50V, Voltage Rating (DC)=50V, Width=6.5mm
C140_OR_0 C140_OR_1 C141_OR_0 C141_OR_1 C176 C177: library part CMP-2000-05477-2, "General Purpose Ceramic Capacitor, 1210, 10uF, 10%, X5R, 15%, 25V", Capacitance=10uF, Case Code (Imperial)=1210, Case Code (Metric)=3225, Dielectric=X5R, Max Operating Temperature=85°C, Min Operating Temperature=-55°C, Package Quantity=1, Tolerance=10%, Voltage=25V, Case/Package=1210, Construction=Flat, Contact Plating=Tin, Depth=2.5mm, Height=2.29mm, Lead Free="Lead Free", Length=3.2mm, Mount="Surface Mount", Packaging="Tape and Reel", Radiation Hardening=No, REACH SVHC="No SVHC", RoHS Compliant=Yes, Series=-, Termination=SMD/SMT, Thickness=0.11inch, Voltage Rating=25V, Voltage Rating (DC)=25V, Width=0.098inch
C145_OR_0 C145_OR_1 C146_OR_0 C146_OR_1 C147_OR_0 C147_OR_1: library part CMP-03422-000642-1, "CAP CER 0.1UF 100V X7R 1210", Capacitance="100 nF", Manufacturer=Yageo, Package=AC1210-0.85, Temperature="-55°C to +125°C", Temperature Characteristic=X7R, Temperature Coefficient=15%, Temperature Range High=+125°C, Temperature Range Low=-55°C, Tolerance=0.1, Voltage Rating="100 V", Automotive=Yes, Automotive Grade="Grade 1", Category=Cap, ComponentLink2Description=Datasheet, ComponentLink2URL=http://www.yageo.com/documents/recent/UPY-AC_NP0X7R_16V-to-630V_12.pdf, Device Class L1="Passive Components", Device Class L2=Capacitors, Device Class L3="Ceramic Capacitors", Digikey Description="CAP CER 0.1UF 100V X7R 1210", Footprint Url=http://www.yageo.com/exep/pages/download/literatures/UPY-C_GEN_24.pdf, Height=0.95mm, Ipc Land Pattern Name=CAPC320250X85, Lead Free=Yes, Manufacturer Part Number=AC1210KKX7R0BB104, Material=Ceramic, Octopart=https://octopart.com/ac1210kkx7r0bb104-yageo-78873719, RoHS=TRUE
C160 C161 C162 C163: library part CMP-2000-06362-2, "CAP CER 47UF 16V X5R 1210", Capacitance=47uF, Case Code (Imperial)=1210, Case Code (Metric)=3225, Dielectric=X5R, Max Operating Temperature=85°C, Min Operating Temperature=-55°C, Package Quantity=1, Tolerance=10%, Voltage=16V, Case/Package=1210, Depth=2.5mm, Height=2.5mm, Lead Free="Lead Free", Length=3.2mm, Material=Ceramic, Mount="Surface Mount", Number of Pins=2, Packaging="Cut Tape", Radiation Hardening=No, REACH SVHC="No SVHC", RoHS Compliant=Yes, Termination=SMD/SMT, Thickness=0.106inch, Voltage Rating=16V, Voltage Rating (DC)=16V, Width=0.098inch
C164 C165: library part CMP-08246-002653-1, "Multilayer Ceramic Capacitors 10uF ±20% 50V X7R SMD 1210", Capacitance=10uF, Case Code (Imperial)=1210, Case Code (Metric)=3225, Dielectric=X7R, Dielectric Material=Ceramic, Max Operating Temperature=125°C, Min Operating Temperature=-55°C, Package Quantity=1000, Tolerance=20%, Voltage Rating=50V, Case/Package=1210, Height=2.5mm, Lead Free="Lead Free", Length=0.126inch, Mount="Surface Mount", Packaging="Tape and Reel", REACH SVHC="No SVHC", Series=C, Termination=SMD/SMT, Thickness=0.11inch, Voltage Rating (DC)=50V, Weight=0.000564oz, Width=0.098inch
C166 C167: library part CMP-04427-003155-1, "Automotive Ceramic Capacitor, 0805, 470nF, 5%, X7R, 15%, 50V", Capacitance=470nF, Case/Package=0805, Dielectric=X7R, Max Operating Temperature=125°C, Min Operating Temperature=-55°C, Package Quantity=2000, Tolerance=5%, Voltage Rating (DC)=50V, Construction=Flat, Depth=1.25mm, Length=2.01mm, Mount="Surface Mount", Packaging="Tape and Reel", Radiation Hardening=No, RoHS Compliant=Yes
C170_REG_1 C170_REG_2 C170_REG_3 C171_REG_1 C171_REG_2 C171_REG_3: library part CMP-00212-84766729-1, "C0805C475J4RACAUTO Cap Ceramic 4.7uF 16V X7R 5% Pad SMD 0805 125C Automotive T/R", Capacitance=4.7µF, Case/Package=0805, Dielectric=X7R, Dielectric Material=Ceramic, Max Operating Temperature=125°C, Min Operating Temperature=-55°C, Tolerance=5%, Voltage Rating=16V, Height=1.4mm, Material=Ceramic, NexarPartId=84766729, Packaging="Cut Tape", RoHS=Compliant, Voltage Rating (DC)=16V
C172_REG_1 C172_REG_2 C172_REG_3 C173_REG_1 C173_REG_2 C173_REG_3: library part CMP-14477-002774-2, "None", Capacitance=1uF, Case Code (Imperial)=1210, Case Code (Metric)=3225, Dielectric=X5R, Max Operating Temperature=125°C, Min Operating Temperature=-55°C, Package Quantity=1, Resistor Type=Ceramic, Tolerance=10%, Voltage=100V, Case/Package=1210, Construction=Flat, Depth=2.5mm, Halogen Free="Halogen Free", Height=1.9mm, Length=3.2mm, Mount="Surface Mount", Number of Pins=2, Packaging="Tape and Reel", Radiation Hardening=No, REACH SVHC="No SVHC", RoHS Compliant=Yes, Series=M, Termination=SMD/SMT, Thickness=0.083inch, Voltage Rating=100V, Voltage Rating (DC)=100V, Width=2.5mm
C179 C180 C181 C182: library part CMP-08246-000988-1, "Cap Ceramic 47uF 16V X7R 20% Pad SMD 2220 +125°C Automotive T/R", Capacitance=47uF, Case Code (Imperial)=2220, Case Code (Metric)=5750, Dielectric=X7R, Max Operating Temperature=125°C, Min Operating Temperature=-55°C, Package Quantity=1, Ratings=AEC-Q200, Tolerance=20%, Voltage Rating=16V, Case/Package=2220, Composition=Ceramic, Depth=5mm, Height=2.3mm, Lead Free="Lead Free", Length=5.7mm, Mount="Surface Mount", Packaging="Tape and Reel", REACH SVHC="No SVHC", Termination=SMD/SMT, Thickness=0.091inch, Voltage Rating (DC)=16V, Weight=0.016932oz, Width=5mm
D1 D2 D3 D5 D11_TCAN1146_0 D11_TCAN1146_1: library part CMP-2000-04993-2, "DIODE GEN PURP 100V 150MA SOD123", Average Rectified Current=150mA, Capacitance=4pF, Forward Voltage=1V, Max Forward Surge Current (Ifsm)=1A, Max Operating Temperature=150°C, Max Repetitive Reverse Voltage (Vrrm)=100V, Max Reverse Leakage Current=5uA, Max Surge Current=2A, Min Operating Temperature=-65°C, Package Quantity=3000, Power Dissipation=400mW, Current Rating=150mA, Element Configuration=Single, Forward Current=150mA, Height=1.2mm, Lead Free="Lead Free", Length=2.85mm, Max Reverse Voltage (DC)=100V, Mount="Surface Mount", Number of Pins=2, Output Current=150mA, Packaging="Tape and Reel", Peak Non-Repetitive Surge Current=2A, Polarity=Standard, Radiation Hardening=No, Recovery Time=4ns, Reverse Recovery Time=4ns, Voltage Rating (DC)=100V, Width=1.8mm
D4 D7: library part CMP-1060-00750-1, "Zener Voltage Regulator, 500 mW, 2-Pin SOD-523, Pb-Free, Tape and Reel", Manufacturer="On Semiconductor", ComponentLink1Description="Manufacturer URL", ComponentLink1URL=http://www.onsemi.com/, ComponentLink2Description=Datasheet, ComponentLink2URL=http://www.onsemi.cn/pub_link/Collateral/MM5Z2V4T1-D.PDF, ComponentLink3Description="Package Specification", ComponentLink3URL=http://www.onsemi.com/pub_link/Collateral/502-01.PDF, DatasheetVersion="Rev. 10", Mounting Technology="Surface Mount", P Max (W)=0.5, PackageDescription="2-Pin SOD, Body 1.2 x 0.8 mm", PackageReference=SOD-523-2-502-01, PackageVersion="Rev. E, 09/2010", Packing="Tape and Reel", PartNumber=MM5Z3V3T1G, RoHS=Pb-Free, VZ Typ (V)=3.3
D6_PHY_0 D6_PHY_1 D6_PHY_2 D6_PHY_3 D6_PHY_4 D6_PHY_5: library part CMP-004-00040-2, "Led, Red/Grn, 180Mcd/230Mcd, 624Nm/525Nm Rohs Compliant: Yes", Component Type=Standard, Design Item ID=CMP-004-00034-2, Pins=4, Source=rgled.SchLib
D8_OR_0 D8_OR_1 D10_OR_0 D10_OR_1: library part CMP-1060-00750-1, "Zener Voltage Regulator, 500 mW, 2-Pin SOD-523, Pb-Free, Tape and Reel", Manufacturer="On Semiconductor", PartNumber=MM5Z3V3T1G, ComponentLink1Description="Manufacturer URL", ComponentLink1URL=http://www.onsemi.com/, ComponentLink2Description=Datasheet, ComponentLink2URL=http://www.onsemi.cn/pub_link/Collateral/MM5Z2V4T1-D.PDF, ComponentLink3Description="Package Specification", ComponentLink3URL=http://www.onsemi.com/pub_link/Collateral/502-01.PDF, DatasheetVersion="Rev. 10", Mounting Technology="Surface Mount", P Max (W)=0.5, PackageDescription="2-Pin SOD, Body 1.2 x 0.8 mm", PackageReference=SOD-523-2-502-01, PackageVersion="Rev. E, 09/2010", Packing="Tape and Reel", RoHS=Pb-Free, VZ Typ (V)=3.3
D9_OR_0 D9_OR_1: library part CMP-12225-000040-1, "TVS DIODE 33V 69.7V SMB", Breakdown Voltage=36.7V, Clamping Voltage=53.3V, Manufacturer=STMicroelectronics, Max Junction Temp=+150°C, Package=SMB-CA, Peak Pulse Current=11.8A, Peak Pulse Power=600W, Reverse Standoff Voltage=33V, Temperature="-55°C to +150°C", Temperature Range Low=-55°C, Automotive=No, Category=Diode, ComponentLink2Description=Datasheet, ComponentLink2URL=https://www.st.com/resource/en/datasheet/smbj.pdf, Device Class L1="Circuit Protection", Device Class L2="TVS Diodes", Device Class L3=unset, Digikey Description="TVS DIODE 33V 69.7V SMB", Direction=Bidirectional, Height=2.65mm, Lead Free=Yes, Manufacturer Part Number=SMBJ33CA-TR, Mouser Description="TVS Diodes - Transient Voltage Suppressors 600W 33V Bidirect", Number Of Channels=1, Octopart=https://octopart.com/smbj33ca-tr-stmicroelectronics-347069, RoHS=TRUE, Standoff Height=0.05mm, Temperature Range High=+150°C
D12_TCAN1146_0 D12_TCAN1146_1: library part CMP-12225-000055-1, "TVS DIODE 26.5V 44V SOT323-3", Breakdown Voltage=28.5V, Capacitance=3pF, Clamping Voltage=44V, Manufacturer=STMicroelectronics, Max Junction Temp=+175°C, Package=SOT323-3L, Peak Pulse Current=3A, Peak Pulse Power=170W, Reverse Standoff Voltage=26.5V, Temperature="-55°C to +175°C", Temperature Range Low=-55°C, Automotive=Yes, Automotive Grade="Grade 0", Category=Diode, ComponentLink2Description=Datasheet, ComponentLink2URL=https://www.st.com/resource/en/datasheet/esdcan02-2bwy.pdf, Device Class L1="Circuit Protection", Device Class L2="TVS Diodes", Device Class L3=unset, Digikey Description="TVS DIODE 26.5V 44V SOT323-3", Direction=Bidirectional, Height=1.1mm, Ipc Land Pattern Name=SOT65P210X95-3, Lead Free=Yes, Manufacturer Part Number=ESDCAN02-2BWY, Mouser Description="TVS Diodes / ESD Suppressors Automotive dual-line Transil, Transient voltage suppressor (TVS) for CAN bus", Number Of Channels=2, Octopart=https://octopart.com/esdcan02-2bwy-stmicroelectronics-58631133, RoHS=TRUE, Standoff Height=0mm, Temperature Range High=+175°C
FB3 FB4 FB5 FB6_PHY_0 FB6_PHY_1 FB6_PHY_2 FB6_PHY_3 FB6_PHY_4 FB6_PHY_5 FB8_PHY_0 FB8_PHY_1 FB8_PHY_2 FB8_PHY_3 FB8_PHY_4 FB8_PHY_5 FB10_PHY_0 FB10_PHY_1 FB10_PHY_2 FB10_PHY_3 FB10_PHY_4 FB10_PHY_5 FB11_PHY_0 FB11_PHY_1 FB11_PHY_2 FB11_PHY_3 FB11_PHY_4 FB11_PHY_5 FB13_SJA1150Q_PINOUT_0 FB13_SJA1150Q_PINOUT_1 FB16_SJA1150Q_PINOUT_0 FB16_SJA1150Q_PINOUT_1 FB19_SJA1150Q_PINOUT_0 FB19_SJA1150Q_PINOUT_1: library part CMP-06046-002069-1, "Chip Ferrite Bead, 0603, 330Ω @ 100MHz, 0.08Ω, 25%, 1.7A", Case Code (Imperial)=0603, Case Code (Metric)=1608, DC Resistance (DCR)=80mR, Max Current Rating=1.7A, Max Operating Temperature=125°C, Min Operating Temperature=-55°C, Package Quantity=4000, Ratings=AEC-Q200, Case/Package=0603, Height=0.037inch, Length=0.063inch, Mount="Surface Mount", Number of Lines=1, Packaging="Tape and Reel", RoHS Compliant=Yes, Width=0.032inch
FB23: library part CMP-0686-00252-4, "Chip Ferrite Bead, 0402, 600Ω @ 100MHz, 0.23Ω, 25%, 900mA", Case Code (Imperial)=0402, Case Code (Metric)=1005, Current Rating=900mA, DC Resistance (DCR)=230mR, Max Operating Temperature=125°C, Min Operating Temperature=-55°C, Package Quantity=10000, Test Frequency=100MHz, Tolerance=25%, Case/Package=0402, Height=0.5mm, Impedance=600R, Lead Free="Lead Free", Length=1mm, Material=Steel, Max Current Rating=900mA, Max DC Current=900mA, Number of Circuits=1, Number of Lines=1, Number of Pins=2, Packaging="Tape and Reel", Termination=SMD/SMT, Width=0.5mm
J1: library part CMP-22265-000001-1, "Right angle plug PCB w. housing"
J2: library part CMP-002-00087-1, "Board Connector", Connector Type="BOARD CONNECTOR", RoHS Compliant=Yes
J3: library part CMP-002-00090-1, "Connector RJ45 Receptacle 8 Position Solder Straight Through Hole 1 Port Tray", Max Operating Temperature=70°C, Min Operating Temperature=0°C, Pins=8
J4: library part CMP-001-0013-3, "CONN HEADER SMD 10POS 1.27MM"
L1_PHY_0 L1_PHY_1 L1_PHY_2 L1_PHY_3 L1_PHY_4 L1_PHY_5: library part CMP-08256-000023-1, "CMC 80UH 70MA 2LN 3.8KOHM SMD"
L2_TCAN1146_0 L2_TCAN1146_1: library part CMP-07251-000006-1, "CMC 51UH 200MA 2LN 2KOHM SMD", Case/Package=4532, Current=200mA, DC Resistance (DCR)=3.5R, Inductance=51uH, Insulation Resistance=10MR, Max Operating Temperature=125°C, Min Operating Temperature=-40°C, Package Quantity=1, Resistance=2kR, Self Resonant Frequency=100kHz, Tolerance=50%, Voltage Rating (DC)=50V, Contact Plating=Tin, Core Material=Ferrite, Current Rating=200mA, DC Current=200mA, Depth=3.4mm, Element Configuration=Dual, Height=0.118inch, Impedance=2kR, Lead Free="Lead Free", Length=4.5mm, Material=Steel, Max DC Current=200mA, Mount="Surface Mount", Number of Lines=2, Packaging="Tape and Reel", REACH SVHC="No SVHC", RoHS Compliant=Yes, Series=SRF4532, Termination=SMD/SMT, Test Frequency=100kHz, Width=0.126inch
L3 L4: library part CMP-1353-00019-6, "Inductor Power Shielded/Molded Wirewound 2.2uH 20% 100KHz Powdered Iron 10A 0.008Ohm DCR T/R Automotive AEC-Q200", Ambient Temperature Range High=85°C, Ambient Temperature Range Low=-40°C, Case/Package=Nonstandard, Current Rating=10A, DC Resistance (DCR)=7.2mΩ, Frequency=22MHz, Inductance=2.2µH, Inductance Tolerance=20%, Max Operating Temperature=125°C, Saturation Current=14.2A, Series Resistance=8mΩ, Test Frequency=100kHz, Composition=Wirewound, Core Material="Composite, Ferrite", Depth=12.6mm, Height=3.3mm, Height - Seated (Max)=3.5052mm, Length=13.5mm, Max DC Current=10A, Min Operating Temperature=-40°C, Mount="Surface Mount", REACH SVHC=Unknown, RMS Current (Irms)=10A, RoHS=Compliant, Self Resonant Frequency=22MHz, Shielding=Shielded, Termination=SMD/SMT, Tolerance=20%, Width=12.6mm
Q1 Q4: library part CMP-2000-05968-1, "N-Channel Enhancement Mode Mosfet, 50 V, 200 mA, -55 to 150 degC, 6-Pin SOT-323, RoHS, Tape and Reel", Id - Continuous Drain Current=200mA, Manufacturer=DiodesIncorporated, Maximum Operating Temperature=+150C, Minimum Operating Temperature=-55C, Package / Case=SOT-323-3, Package Description="3-Pin Small Outline Transistor, Body 2 x 1.25 mm, Pitch 0.65 mm", Package Reference=SOT323, Pd - Power Dissipation=200mW, Rds On - Drain-Source Resistance=1.4Ohms, Vds - Drain-Source Breakdown Voltage=75V, Vgs - Gate-Source Voltage=20V, Brand=DiodesIncorporated, Channel Mode=Enhancement, Configuration=Single, Datasheet URL=http://www.diodes.com/_files/datasheets/ds30206.pdf, Datasheet Version="Rev. 11-2, 09/2013", Factory Pack Quantity=3000, Forward Transconductance - Min=0.1S, Height=1mm, Length=2.2mm, Manufacturer URL=http://www.diodes.com/, Mounting Style=SMD/SMT, Mounting Technology=SurfaceMount, Number Of Channels=1Channel, Packaging=Reel, Product=MOSFETSmallSignal, Product Category=MOSFET, RoHS=True, Series=BSS138, Technology=Si, Transistor Polarity=N-Channel, Transistor Type=1N-Channel, Type=EnhancementModeFieldEffectTransistor, Typical Turn-Off Delay Time=20ns, Typical Turn-On Delay Time=20ns, Unit Weight=0.000212oz, Width=1.35mm
Q2 Q3: library part CMP-013-00018-2, "Trans MOSFET P-CH 20V 22.1A 8-Pin PowerPAK 1212 EP T/R", Component Type=Standard, Design Item ID=CMP-013-00036-4, Pins=5, Source=SISH615ADN-T1-GE3.SchLib
Q5_OR_0 Q5_OR_1 Q6_OR_0 Q6_OR_1: library part CMP-32901-001049-1, "TRENCH 40<-<100V PG-TDSON-8"
R1 R2 R3 R4 R5 R6 R7 R8 R9 R10 R11 R12 R13 R14 R15 R16 R17 R18 R19 R20 R21 R22 R23_PHY_0 R23_PHY_1 R23_PHY_2 R23_PHY_3 R23_PHY_4 R23_PHY_5 R24_PHY_0 R24_PHY_1 R24_PHY_2 R24_PHY_3 R24_PHY_4 R24_PHY_5 R25_PHY_0 R25_PHY_1 R25_PHY_2 R25_PHY_3 R25_PHY_4 R25_PHY_5 R26_PHY_0 R26_PHY_1 R26_PHY_2 R26_PHY_3 R26_PHY_4 R26_PHY_5 R27_PHY_0 R27_PHY_1 R27_PHY_2 R27_PHY_3 R27_PHY_4 R27_PHY_5 R28_PHY_0 R28_PHY_1 R28_PHY_2 R28_PHY_3 R28_PHY_4 R28_PHY_5 R29_PHY_0 R29_PHY_1 R29_PHY_2 R29_PHY_3 R29_PHY_4 R29_PHY_5 R30_PHY_0 R30_PHY_1 R30_PHY_2 R30_PHY_3 R30_PHY_4 R30_PHY_5 R31_PHY_0 R31_PHY_1 R31_PHY_2 R31_PHY_3 R31_PHY_4 R31_PHY_5 R32_PHY_0 R32_PHY_1 R32_PHY_2 R32_PHY_3 R32_PHY_4 R32_PHY_5 R33_PHY_0 R33_PHY_1 R33_PHY_2 R33_PHY_3 R33_PHY_4 R33_PHY_5 R34_PHY_0 R34_PHY_1 R34_PHY_2 R34_PHY_3 R34_PHY_4 R34_PHY_5 R35_PHY_0 R35_PHY_1 R35_PHY_2 R35_PHY_3 R35_PHY_4 R35_PHY_5 R36_PHY_0 R36_PHY_1 R36_PHY_2 R36_PHY_3 R36_PHY_4 R36_PHY_5 R37_PHY_0 R37_PHY_1 R37_PHY_2 R37_PHY_3 R37_PHY_4 R37_PHY_5 R38_PHY_0 R38_PHY_1 R38_PHY_2 R38_PHY_3 R38_PHY_4 R38_PHY_5 R39_PHY_0 R39_PHY_1 R39_PHY_2 R39_PHY_3 R39_PHY_4 R39_PHY_5 R40_PHY_0 R40_PHY_1 R40_PHY_2 R40_PHY_3 R40_PHY_4 R40_PHY_5 R41_PHY_0 R41_PHY_1 R41_PHY_2 R41_PHY_3 R41_PHY_4 R41_PHY_5 R42_PHY_0 R42_PHY_1 R42_PHY_2 R42_PHY_3 R42_PHY_4 R42_PHY_5 R43_PHY_0 R43_PHY_1 R43_PHY_2 R43_PHY_3 R43_PHY_4 R43_PHY_5 R44_PHY_0 R44_PHY_1 R44_PHY_2 R44_PHY_3 R44_PHY_4 R44_PHY_5 R45_SJA1150Q_PINOUT_0 R45_SJA1150Q_PINOUT_1 R46 R47 R48 R49 R50 R61 R62 R63 R64 R65 R66 R67_OR_0 R67_OR_1 R68_OR_0 R68_OR_1 R70_OR_0 R70_OR_1 R71_OR_0 R71_OR_1 R72_OR_0 R72_OR_1 R73_OR_0 R73_OR_1 R74_OR_0 R74_OR_1 R75_OR_0 R75_OR_1 R76_OR_0 R76_OR_1 R77_OR_0 R77_OR_1 R78_OR_0 R78_OR_1 R79_OR_0 R79_OR_1 R80_OR_0 R80_OR_1 R81_TCAN1146_0 R81_TCAN1146_1 R82_TCAN1146_0 R82_TCAN1146_1 R83_TCAN1146_0 R83_TCAN1146_1 R84_TCAN1146_0 R84_TCAN1146_1 R85 R87 R88 R89_REG_1 R89_REG_2 R89_REG_3 R90_REG_1 R90_REG_2 R90_REG_3 R91_REG_1 R91_REG_2 R91_REG_3 R92_REG_1 R92_REG_2 R92_REG_3 R93_REG_1 R93_REG_2 R93_REG_3 R94 R95 R96 R97 R98 R99_PHY_0 R99_PHY_1 R99_PHY_2 R99_PHY_3 R99_PHY_4 R99_PHY_5: library part CMP-009-00002-14, "Resistor"
R51 R52 R53 R54 R55 R56 R57 R58 R59 R60 R86: library part CMP-009-00118-2, "READ THE NAME", Component Type=Standard, Design Item ID=CMP-009-00206-2, Pins=2, Source=0402jump.SchLib
R69_OR_0 R69_OR_1: library part CMP-00597-24927456-1, "KRL6432E-M-R003-F-T1 Metal Foil Low Resistance Chip Resistor (long-side terminal), 2512, RoHS", Case Code (Imperial)=2512, Case Code (Metric)=6432, Max Operating Temperature=155°C, Min Operating Temperature=-55°C, Power Rating=3W, Resistance=3mΩ, Temperature Coefficient=50ppm/°C, Tolerance=1%, Case/Package=2512, Composition="Metal Foil", Height=700µm, Length=3.1mm, Lifecycle Status=Production, Max Thickness=700µm, NexarPartId=24927456, RoHS=Compliant, Termination=SMD/SMT, Weight=40.511469mg, Width=6.3mm
SW1 SW2 SW3_TCAN1146_0 SW3_TCAN1146_1: library part CMP-10040-000029-1, "SWITCH TACTILE SPST-NO 0.02A 15V", Current Rating=5A, Flammability Rating="UL94 V-0", Insulation Color=Black, Max Operating Temperature=85°C, Min Operating Temperature=-40°C, Operating Force=240gf, Actuator Type=Standard, Connector Type=USB, Contact Plating=Gold, Gender=Receptacle, Illumination Type=Non-Illuminated, Mechanical Life=500000Cycles, Mount="Surface Mount", Number of Contacts=24, Number of Ports=1, Packaging="Tape and Reel", Switch Function=Off-Mom, Switch Travel=0.13mm, Termination=Solder, Throw Configuration=SPST
U1: library part CMP-015-00022-5, "LAN8830 Series RGMII Interface Gigabit Ethernet Transceiver - VQFN-48", Case/Package=VQFN, Pins=48
U2_PHY_0 U2_PHY_1 U2_PHY_2 U2_PHY_3 U2_PHY_4 U2_PHY_5: library part CMP-015-00023-5, "100/1000BASE-T1 Rgmii/sgmii Phy", Case/Package=VQFN, Pins=48
U3_SJA1150Q_PINOUT_0 U3_SJA1150Q_PINOUT_1: library part CMP-015-00025-2, "Ethernet Controller, Ethernet Switch, IEEE 802.3, 1.2 V, LFBGA, 159 Pins", Max Operating Temperature=105°C, Min Operating Temperature=-40°C
U4: library part CMP-12105-000107-1, "IC MCU 32BIT 128KB FLASH 100LQFP"
U5: library part CMP-00572-106914266-1, "Clock Fanout Buffer (Distribution) IC 110 200 MHz 20-VFQFN Exposed Pad", Manufacturer Lifecycle Status=ACTIVE, Max Operating Temperature=105°C, Max Output Frequency=200MHz, Max Supply Voltage=3.465V, Min Operating Temperature=-40°C, Min Supply Voltage=1.71V, Package Quantity=0, ComponentLink1Description="Manufacturer's Website", ComponentLink1URL=http://www.renesas.com, ComponentLink2Description="Datasheet URL", ComponentLink2URL=https://octopart.com/cad-content/api/get-model-datasheet/15189/106914266, ComponentLink3Description="Manufacturer's Package Drawing", ComponentLink3URL=https://www.renesas.com/en/document/psc/20-vfqfpn-package-outline-drawing-30-x-30-x-090-mm-040mm-pitch-165-x-165-mm-epad-wettable-flank, Contact Plating=Tin, Export Control Classification Number (ECCN) Code=NLR, Harmonized Tariff Schedule (HTS) Code=8540000000, Height=1mm, HelpURL=https://octopart.com/cad-content/api/get-model-datasheet/15189/106914266, Lead Free="Lead Free", Length=3mm, Lifecycle Status=Production, Mount="Surface Mount", MSL=1, Number of Pins=20, Part Family=74FCT3807S, Pitch=400µm, RoHS=Compliant, Thickness=1mm, Width=3mm
U6: library part CMP-1557-00012-2, "SENSOR CURRENT HALL 12.5A AC/DC", Case/Package=SOIC, Current Sensing=12.5A, Frequency=100kHz, Max Operating Temperature=125°C, Max Supply Current=5.5mA, Max Supply Voltage=5.5V, Min Operating Temperature=-40°C, Min Supply Voltage=3V, Operating Supply Voltage=3.3V, Package Quantity=1, Quiescent Current=4mA, -3db Bandwidth=100kHz, Accuracy=5%, Bandwidth=100kHz, Height=1.5mm, Length=4.9mm, Linearity=1%, Number Of Channels=1, Number of Pins=8, Packaging="Tape and Reel", Polarity=Bidirectional, REACH SVHC="No SVHC", Response Time=4.6us, RoHS Compliant=Yes, Sensitivity=110mV/A, Series=-, Width=3.9mm
U7_OR_0 U7_OR_1: library part CMP-019-00057-2, "Automotive ideal diode with circuit breaker, 200-kHz ACS, UV , OV protection and SLEEP mode 24-VQFN -40 to 125", Case/Package=VQFN, Pins=24
U8_TCAN1146_0 U8_TCAN1146_1: library part CMP-318-000000-2, "Automotive CAN FD transceiver with watchdog, bus diagnostics and partial networking via sele 14-SOT-23-THIN -40 to 150", Component Type=Standard, Design Item ID=CMP-015-00012-2, Pin Count=14, Source=TCAN1146DYYRQ1.SchLib
U9: library part CMP-04918-000675-1, "10-A AUTOMOTIVE BUCK CONVERTER O"
U10_REG_1 U10_REG_2 U10_REG_3: library part CMP-0136-00358-1, "1A, Low Voltage, Low Quiescent Current LDO Regulator, 8-Pin DFN, Extended Temperature, Tape and Reel", DatasheetVersion="revC, Aug-2007", PackageDescription="8-Lead Plastic Dual Flat, No Lead Package (MF) - 3x3x0.9mm Body [DFN]", PackageReference=DFN-MF8, PackageVersion="revBB, Aug-2009"
U11: library part CMP-019-00063-1, "DC-DC Switching Synchronous Buck Regulator, Adjustable, 3.8-40 V in, 0.8-40 V out, 3 A out, HSOIC-8", Max Operating Temperature=125°C, Max Supply Voltage=40V, Min Operating Temperature=-40°C
Y1: library part CMP-2000-05733-3, "Crystal 25MHz ±20ppm (Tol) ±30ppm (Stability) 18pF FUND 60Ω 4-Pin SMD T/R", Case/Package=CSMD, ESR (Equivalent Series Resistance)=60R, Frequency=25MHz, Frequency Stability=30ppm, Frequency Tolerance=20ppm, Load Capacitance=18pF, Max Operating Temperature=85°C, Min Operating Temperature=-40°C, Operating Frequency="25 MHz", Package Quantity=1000, Depth=2.5mm, Height=0.039inch, Lead Free="Lead Free", Length=3.2mm, Mount="Surface Mount", Number of Pins=4, Packaging="Tape and Reel", Radiation Hardening=No, Series=ABM8G, Series Resistance=60R, Termination=SMD/SMT, Tolerance=20ppm, Width=0.098inch
Y2: library part CMP-40224-000006-1, "CRYSTAL 32.7680KHZ 12.5PF SMD", Frequency=32.768kHz, Load Capacitance=12.5pF, Manufacturer="ECS International", Package=ECX-1210, Temperature="-40°C to +85°C", Temperature Range High=+85°C, Temperature Range Low=-40°C, Tolerance=20ppm, Automotive=No, Category=Crys, ComponentLink2Description=Datasheet, ComponentLink2URL=https://ecsxtal.com/store/pdf/ECX-1210.pdf, Device Class L1="Passive Components", Device Class L2="Crystals / Oscillators", Device Class L3=Crystals, Digikey Description="CRYSTAL 32.7680KHZ 12.5PF SMD", Esr=90kΩ, Height=0.5mm, Lead Free=Yes, Manufacturer Part Number=ECS-.327-12.5-1210-TR, Octopart=https://octopart.com/ecs-.327-12.5-1210-tr-ecs+international-81221340, RoHS=TRUE, Series=ECX-1210
Y3: library part CMP-27762-011440-1, "XTAL OSC XO 25.0000MHZ CMOS SMD", Case/Package=SMD/SMT, Frequency=25MHz, Frequency Stability=30ppm, Load Capacitance=15pF, Max Operating Temperature=70°C, Max Supply Current=6mA, Max Supply Voltage=3.63V, Min Operating Temperature=-20°C, Min Supply Voltage=2.97V, Operating Supply Voltage=3.3V, Package Quantity=3000, Height=0.028inch, Length=0.063inch, Mount="Surface Mount", Number of Pins=4, Packaging="Tape and Reel", Termination=SMD/SMT, Width=0.047inch

## Via types
v1: diameter 0.5, hole 0.3, Top Layer to Bottom Layer, 319 vias
v2: diameter 0.66, hole 0.33, Top Layer to Bottom Layer, tented top, 6 vias

## Nets (pads, with @x,y where several pads share a name; then routed paths per layer and width w, separated by ;. In a path a pad name is that pad's centre, name@x,y a point inside that pad or via, vN(x,y) a via of type N, cw(c..) or ccw(c..) an arc to the next point about the centre after c; other vN are vias at no path point)
1V1_8830: C172_REG_3.1 C173_REG_3.1 R89_REG_3.2 R92_REG_3.2 U10_REG_3.8
1V1_8870: C178.2 C179.1 C180.1 C181.1 C182.1 L4.2 R94.2 R96.2
1V2: C100_SJA1150Q_PINOUT_0.1 C100_SJA1150Q_PINOUT_1.1 C101_SJA1150Q_PINOUT_0.1 C101_SJA1150Q_PINOUT_1.1 C102_SJA1150Q_PINOUT_0.1 C102_SJA1150Q_PINOUT_1.1 FB13_SJA1150Q_PINOUT_0.1 FB13_SJA1150Q_PINOUT_1.1 FB16_SJA1150Q_PINOUT_0.1 FB16_SJA1150Q_PINOUT_1.1 FB19_SJA1150Q_PINOUT_0.1 FB19_SJA1150Q_PINOUT_1.1
1V2_SW0: C172_REG_1.1 C173_REG_1.1 R89_REG_1.2 R92_REG_1.2 U10_REG_1.8
1V2_SW1: C172_REG_2.1 C173_REG_2.1 R89_REG_2.2 R92_REG_2.2 U10_REG_2.8
3V3: C12.1 C13.1 C14.1 C15.1 C16.1 C17.1 C55_PHY_0.1 C55_PHY_1.1 C55_PHY_2.1 C55_PHY_3.1 C55_PHY_4.1 C55_PHY_5.1 C56_PHY_0.1 C56_PHY_1.1 C56_PHY_2.1 C56_PHY_3.1 C56_PHY_4.1 C56_PHY_5.1 C57_PHY_0.1 C57_PHY_1.1 C57_PHY_2.1 C57_PHY_3.1 C57_PHY_4.1 C57_PHY_5.1 C58_PHY_0.1 C58_PHY_1.1 C58_PHY_2.1 C58_PHY_3.1 C58_PHY_4.1 C58_PHY_5.1 C60_SJA1150Q_PINOUT_0.1 C60_SJA1150Q_PINOUT_1.1 C61_SJA1150Q_PINOUT_0.1 C61_SJA1150Q_PINOUT_1.1 C62_SJA1150Q_PINOUT_0.1 C62_SJA1150Q_PINOUT_1.1 C63_SJA1150Q_PINOUT_0.1 C63_SJA1150Q_PINOUT_1.1 C80_SJA1150Q_PINOUT_0.1 C80_SJA1150Q_PINOUT_1.1 C81_SJA1150Q_PINOUT_0.1 C81_SJA1150Q_PINOUT_1.1 C82_SJA1150Q_PINOUT_0.1 C82_SJA1150Q_PINOUT_1.1 C83_SJA1150Q_PINOUT_0.1 C83_SJA1150Q_PINOUT_1.1 C84_SJA1150Q_PINOUT_0.1 C84_SJA1150Q_PINOUT_1.1 C85_SJA1150Q_PINOUT_0.1 C85_SJA1150Q_PINOUT_1.1 C86_SJA1150Q_PINOUT_0.1 C86_SJA1150Q_PINOUT_1.1 C87_SJA1150Q_PINOUT_0.1 C87_SJA1150Q_PINOUT_1.1 C88_SJA1150Q_PINOUT_0.1 C88_SJA1150Q_PINOUT_1.1 C89_SJA1150Q_PINOUT_0.1 C89_SJA1150Q_PINOUT_1.1 C90_SJA1150Q_PINOUT_0.1 C90_SJA1150Q_PINOUT_1.1 C91_SJA1150Q_PINOUT_0.1 C91_SJA1150Q_PINOUT_1.1 C92_SJA1150Q_PINOUT_0.1 C92_SJA1150Q_PINOUT_1.1 C93_SJA1150Q_PINOUT_0.1 C93_SJA1150Q_PINOUT_1.1 C94_SJA1150Q_PINOUT_0.1 C94_SJA1150Q_PINOUT_1.1 C95_SJA1150Q_PINOUT_0.1 C95_SJA1150Q_PINOUT_1.1 C96_SJA1150Q_PINOUT_0.1 C96_SJA1150Q_PINOUT_1.1 C97_SJA1150Q_PINOUT_0.1 C97_SJA1150Q_PINOUT_1.1 C98_SJA1150Q_PINOUT_0.1 C98_SJA1150Q_PINOUT_1.1 C99_SJA1150Q_PINOUT_0.1 C99_SJA1150Q_PINOUT_1.1 C114.2 C116.1 C117.1 C118.1 C119.1 C120.1 C121.1 C128.1 C129.1 C132.1 C133.1 C134.1 C135.1 C136.1 C137.1 C138.1 C160.1 C161.1 C162.1 C163.1 C168.2 C170_REG_1.1 C170_REG_2.1 C170_REG_3.1 C171_REG_1.1 C171_REG_2.1 C171_REG_3.1 C176.1 C177.1 FB4.1 FB10_PHY_0.1 FB10_PHY_1.1 FB10_PHY_2.1 FB10_PHY_3.1 FB10_PHY_4.1 FB10_PHY_5.1 FB11_PHY_0.1 FB11_PHY_1.1 FB11_PHY_2.1 FB11_PHY_3.1 FB11_PHY_4.1 FB11_PHY_5.1 FB23.1 J3.L2 J3.L4 J4.1 L3.2 R6.2 R7.2 R8.1 R9.1 R10.2 R11.1 R12.2 R13.1 R26_PHY_0.1 R26_PHY_1.1 R26_PHY_2.1 R26_PHY_3.1 R26_PHY_4.1 R26_PHY_5.1 R29_PHY_0.2 R29_PHY_1.2 R29_PHY_2.2 R29_PHY_3.2 R29_PHY_4.2 R29_PHY_5.2 R30_PHY_0.1 R30_PHY_1.1 R30_PHY_2.1 R30_PHY_3.1 R30_PHY_4.1 R30_PHY_5.1 R31_PHY_0.2 R31_PHY_1.2 R31_PHY_2.2 R31_PHY_3.2 R31_PHY_4.2 R31_PHY_5.2 R32_PHY_0.2 R32_PHY_1.2 R32_PHY_2.2 R32_PHY_3.2 R32_PHY_4.2 R32_PHY_5.2 R35_PHY_0.2 R35_PHY_1.2 R35_PHY_2.2 R35_PHY_3.2 R35_PHY_4.2 R35_PHY_5.2 R38_PHY_0.2 R38_PHY_1.2 R38_PHY_2.2 R38_PHY_3.2 R38_PHY_4.2 R38_PHY_5.2 R45_SJA1150Q_PINOUT_0.2 R45_SJA1150Q_PINOUT_1.2 R46.2 R50.1 R87.2 R90_REG_1.1 R90_REG_2.1 R90_REG_3.1 SW1.2 U1.17 U1.24 U1.28 U1.35 U1.41 U2_PHY_0.13 U2_PHY_0.20 U2_PHY_0.36 U2_PHY_1.13 U2_PHY_1.20 U2_PHY_1.36 U2_PHY_2.13 U2_PHY_2.20 U2_PHY_2.36 U2_PHY_3.13 U2_PHY_3.20 U2_PHY_3.36 U2_PHY_4.13 U2_PHY_4.20 U2_PHY_4.36 U2_PHY_5.13 U2_PHY_5.20 U2_PHY_5.36 U3_SJA1150Q_PINOUT_0.D4 U3_SJA1150Q_PINOUT_0.D5 U3_SJA1150Q_PINOUT_0.D7 U3_SJA1150Q_PINOUT_0.D8 U3_SJA1150Q_PINOUT_0.D10 U3_SJA1150Q_PINOUT_0.D11 U3_SJA1150Q_PINOUT_0.E4 U3_SJA1150Q_PINOUT_0.E11 U3_SJA1150Q_PINOUT_0.G4 U3_SJA1150Q_PINOUT_0.G11 U3_SJA1150Q_PINOUT_0.H4 U3_SJA1150Q_PINOUT_0.H11 U3_SJA1150Q_PINOUT_0.K11 U3_SJA1150Q_PINOUT_0.L5 U3_SJA1150Q_PINOUT_0.L8 U3_SJA1150Q_PINOUT_0.L10 U3_SJA1150Q_PINOUT_0.L11 U3_SJA1150Q_PINOUT_1.D4 U3_SJA1150Q_PINOUT_1.D5 U3_SJA1150Q_PINOUT_1.D7 U3_SJA1150Q_PINOUT_1.D8 U3_SJA1150Q_PINOUT_1.D10 U3_SJA1150Q_PINOUT_1.D11 U3_SJA1150Q_PINOUT_1.E4 U3_SJA1150Q_PINOUT_1.E11 U3_SJA1150Q_PINOUT_1.G4 U3_SJA1150Q_PINOUT_1.G11 U3_SJA1150Q_PINOUT_1.H4 U3_SJA1150Q_PINOUT_1.H11 U3_SJA1150Q_PINOUT_1.K11 U3_SJA1150Q_PINOUT_1.L5 U3_SJA1150Q_PINOUT_1.L8 U3_SJA1150Q_PINOUT_1.L10 U3_SJA1150Q_PINOUT_1.L11 U4.6 U4.11 U4.27 U4.50 U4.75 U4.100 U5.4 U5.8 U5.15 U5.20 U6.8 U9.5 U9.7 U10_REG_1.1 U10_REG_1.2 U10_REG_2.1 U10_REG_2.2 U10_REG_3.1 U10_REG_3.2 U11.2 U11.3 Y3.1 Y3.4 | length 46
  Top Layer w0.2: R38_PHY_5.2@174.85,249.25 174.85,249.175 175.525,248.5 176.75,248.5 177.25,249 v1(178,249) ; R38_PHY_4.2@183.75,220.85 183.825,220.85 184.5,221.525 184.5,222.75 184,223.25 v1(184,224) ; v1(185.75,245) 186.914,243.836 186.914,242.439 186.325,241.85 R29_PHY_5.2@186.25,241.85 ; v1(188,231.75) 189.164,232.914 190.561,232.914 191.15,232.325 R29_PHY_4.2@191.15,232.25 ; R38_PHY_3.2@203.75,220.85 203.825,220.85 204.5,221.525 204.5,222.75 204,223.25 v1(204,224) ; v1(208,231.75) 209.164,232.914 210.561,232.914 211.15,232.325 R29_PHY_3.2@211.15,232.25 ; R38_PHY_2.2@223.75,220.85 223.825,220.85 224.5,221.525 224.5,222.75 224,223.25 v1(224,224) ; v1(228,231.75) 229.164,232.914 230.561,232.914 231.15,232.325 R29_PHY_2.2@231.15,232.25 ; R29_PHY_0.2@239.75,258.15 239.675,258.15 239.086,257.561 239.086,256.164 v1(240.25,255) ; R38_PHY_1.2@243.75,220.85 243.825,220.85 244.5,221.525 244.5,222.75 244,223.25 v1(244,224) ; v1(248,231.75) 249.164,232.914 250.561,232.914 251.15,232.325 R29_PHY_1.2@251.15,232.25 ; v1(248,251) 248.75,251 249.25,251.5 250.475,251.5 251.15,250.825 R38_PHY_0.2@251.15,250.75
  other v1: 180.25,224 200.25,224 220.25,224 240.25,224 248,247.25 178,252.75
3V3_1V1_8830_V_SENSE: R92_REG_3.1 R93_REG_3.2
3V3_1V1_8870_V_SENSE: R96.1 R98.2
3V3_1V2_SW0_V_SENSE: R92_REG_1.1 R93_REG_1.2
3V3_1V2_SW1_V_SENSE: R92_REG_2.1 R93_REG_2.2
3V3_3V3_MAIN_V_SENSE: R87.1 R88.2
3V3_APM_OR_nFLT: R73_OR_1.1 U7_OR_1.12